# Altium PCB ECUEXT2_23.PcbDoc
Units mm, origin at the board's own origin, x right, y up, seen from the top; angles counter-clockwise.
Board outline 81.53 x 46.61 mm, 2 copper layers (Top Layer, Bottom Layer); 22 components, 27 nets, 140 pads, 5 vias.
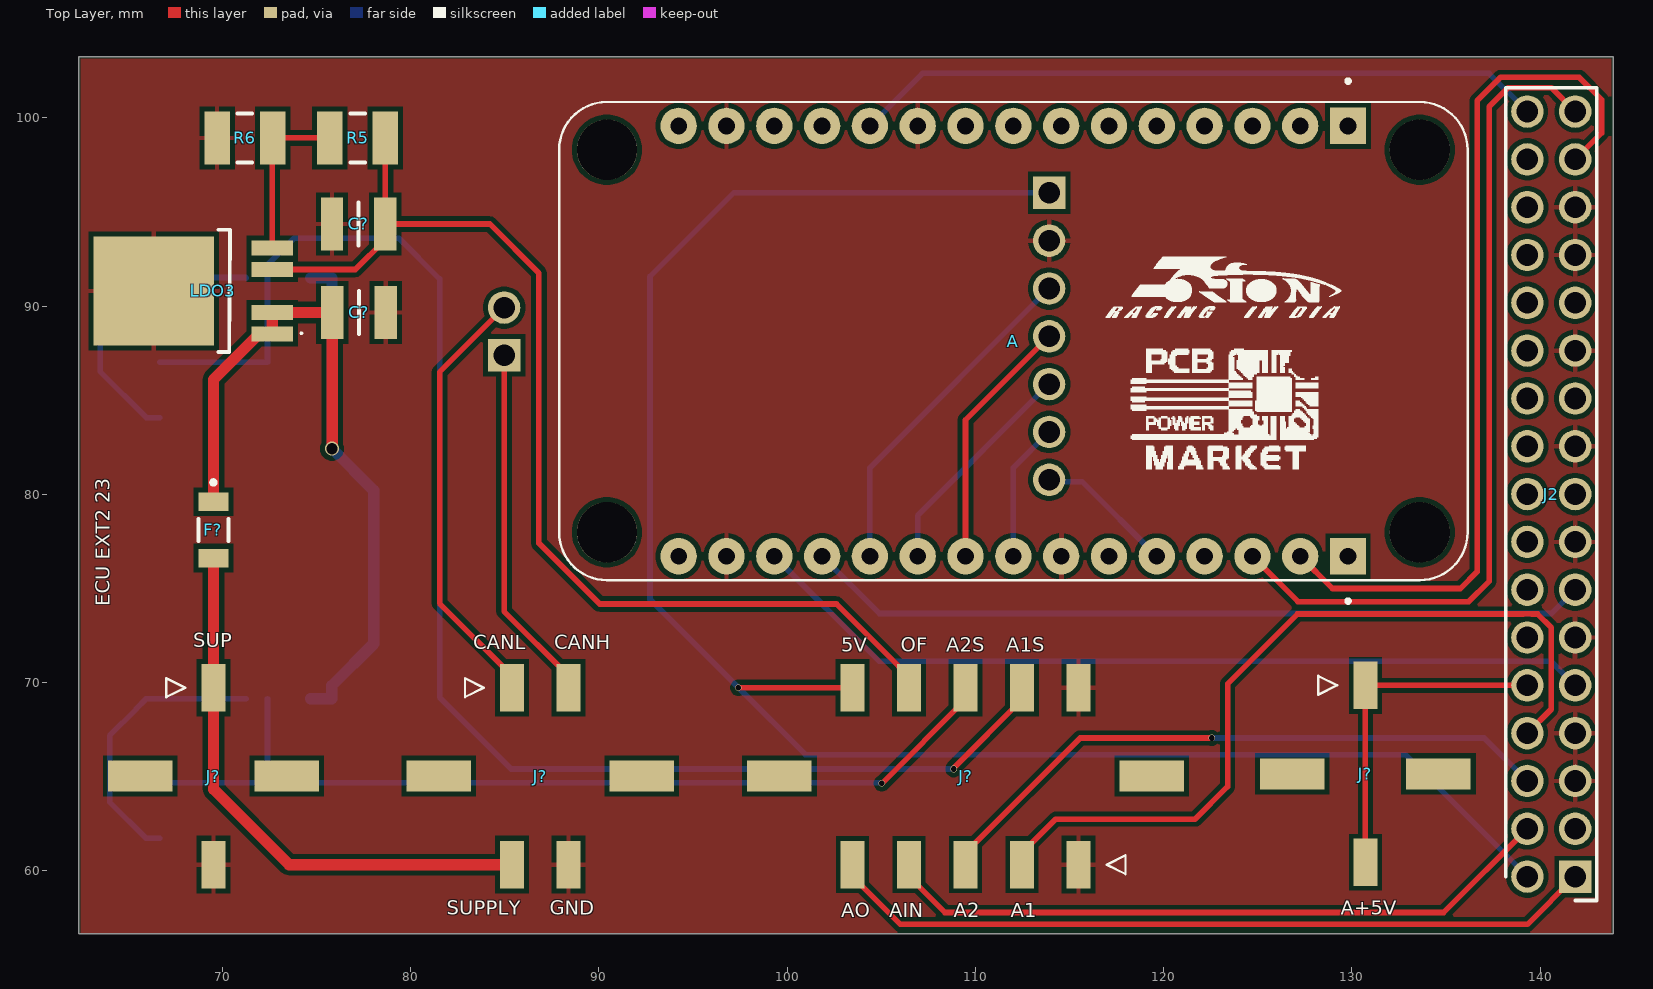
[diagram p0: Top Layer view]
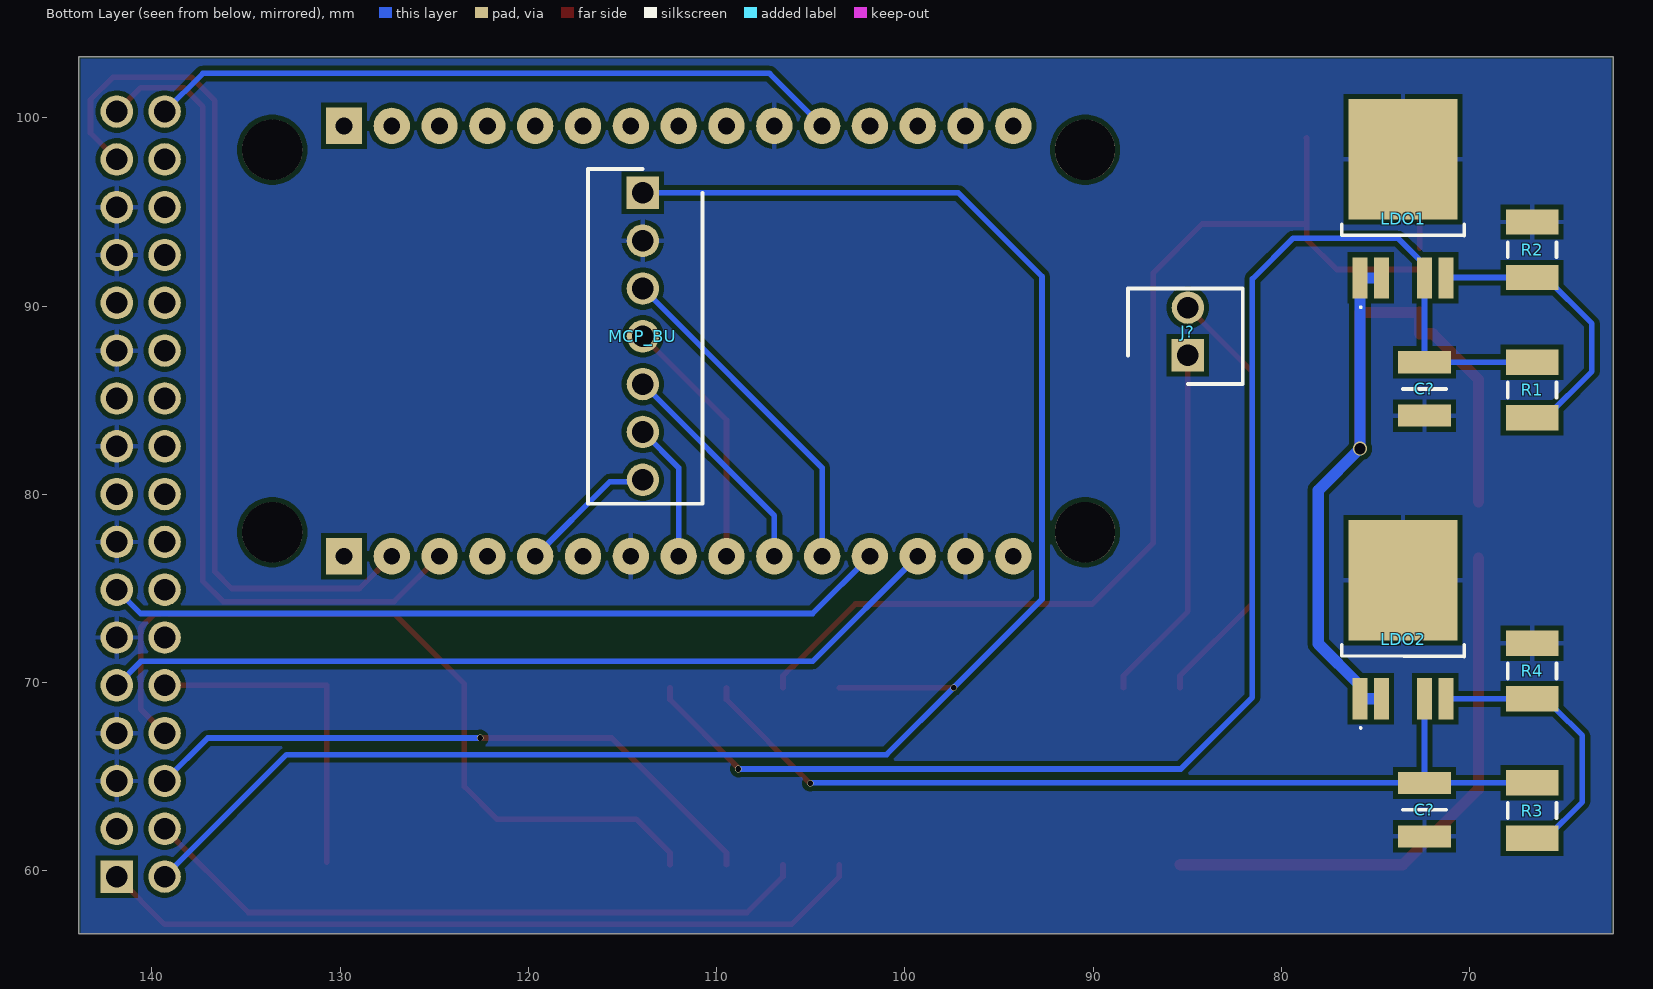
[diagram p1: Bottom Layer view, seen from below]
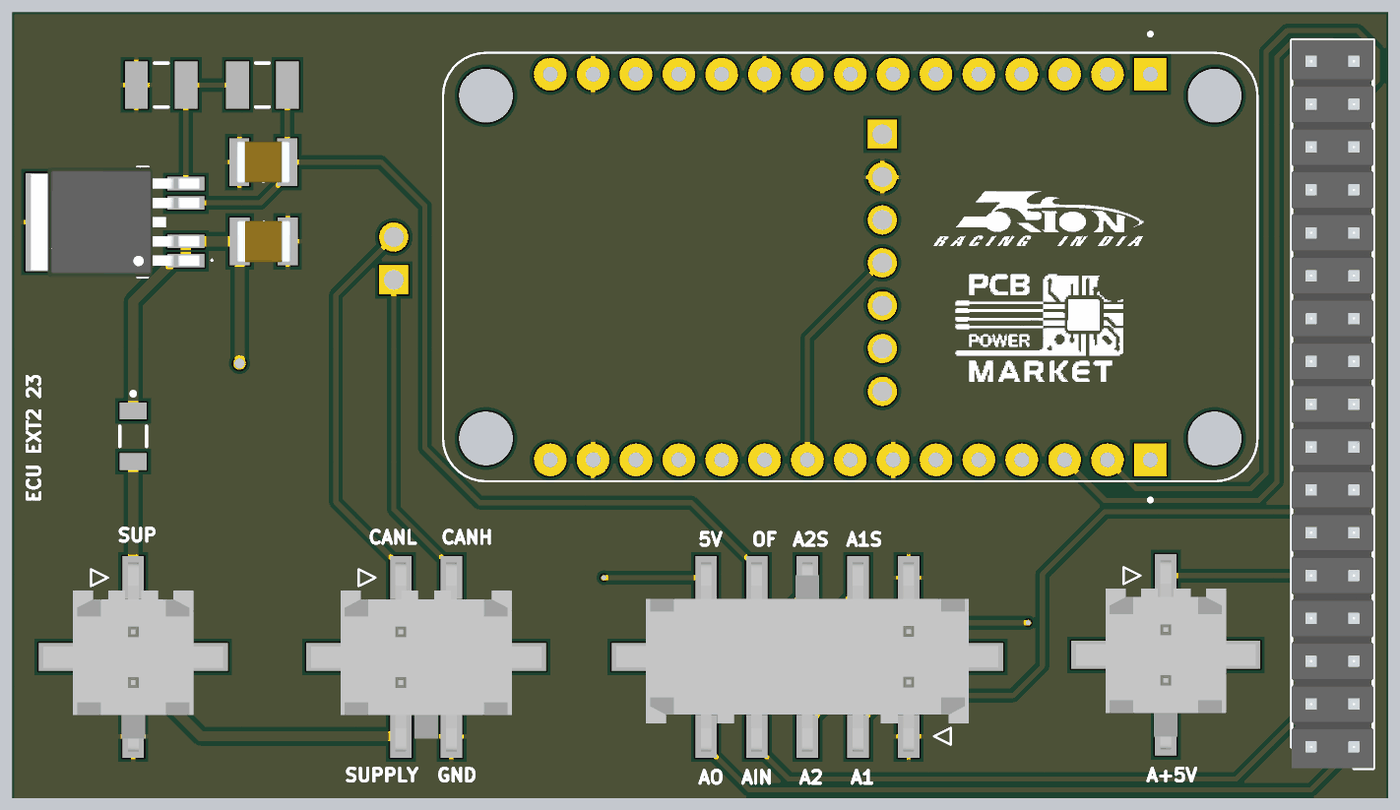
[diagram p2: 3D render of the assembled board from above, using the file's embedded part models]
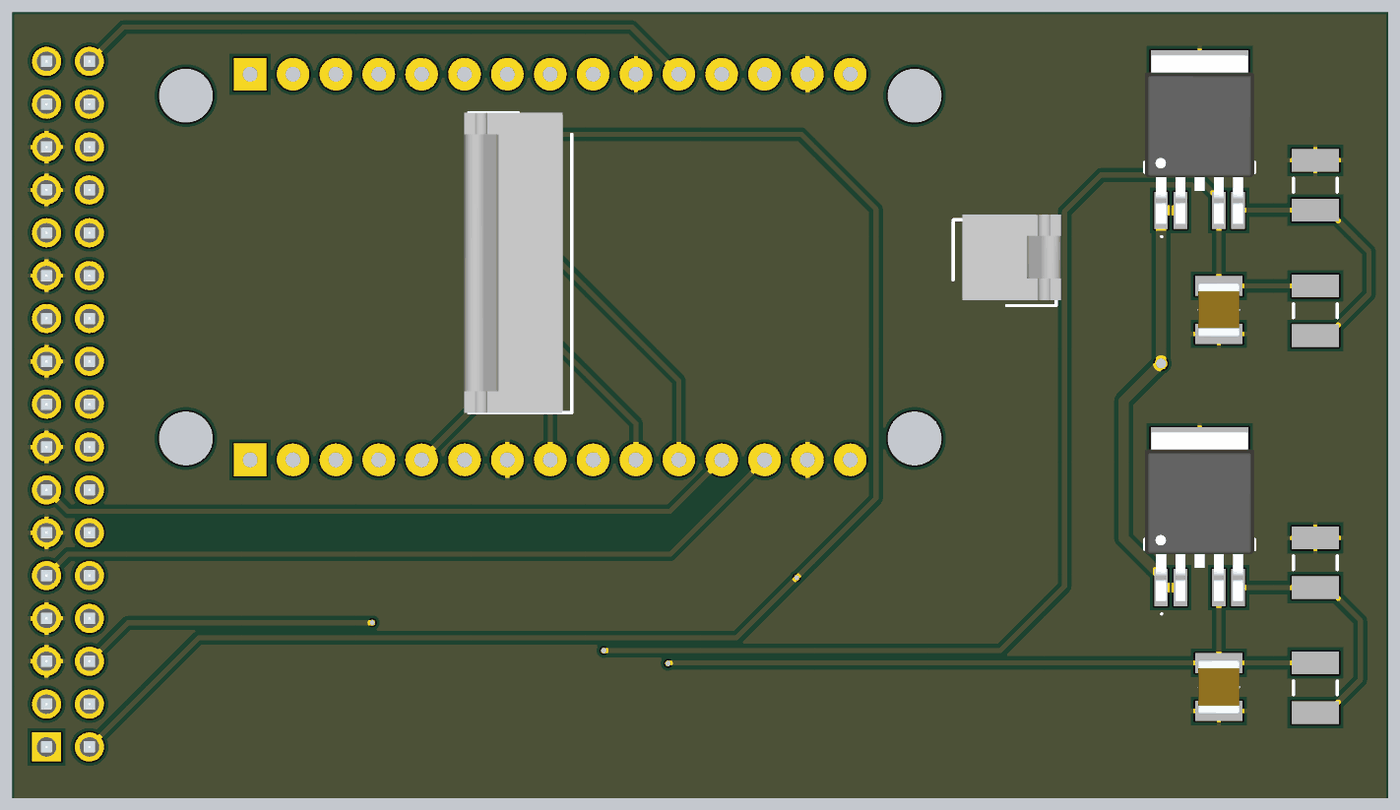
[diagram p3: 3D render of the assembled board from below, using the file's embedded part models]

## Layer stack, top to bottom
Top Solder: solder mask 0.0102, Solder Resist, Dk 3.5
Top Layer: signal copper 0.0356
Dielectric 1: dielectric 0.32, FR-4, Dk 4.8
Bottom Layer: signal copper 0.0356
Bottom Solder: solder mask 0.0102, Solder Resist, Dk 3.5

## Board outline
62.357,56.642 143.891,56.642 143.891,103.251 62.357,103.251

## Design rules (kind name [scope] priority, off if disabled: settings)
Clearance [All] p1: gap=0.254 ignorepadtopadclearanceinfootprint=FALSE except(0: Arc-Hole Track-Hole SMDPad-Hole THPad-Hole Via-Hole Fill-Hole Poly-Hole Region-Hole Text-Hole)
PolygonConnect [All] p1: connectstyle=Relief reliefconductorwidth=0.254 reliefentries=4 polygonreliefangle="90 Angle" airgapwidth=0.254
RoutingVias [All] p1: holewidth=0.3 width=0.35 viastyle="Through Hole" minholewidth=0.3 minwidth=0.35 maxholewidth=0.6 maxwidth=0.75
SolderMaskExpansion [All] p1: expansion=0.102 istentingtop=FALSE
Width [All] p1: maxlimit=0.6 minlimit=0.3 preferedwidth=0.3 minimp=50.000000 maximp=50.000000 favimp=50.000000
30 further rules are at their usual default settings.

## Classes and differential pairs
component class ECUEXT2_23: A C? F? J2 J? LDO1 LDO2 LDO3 MCP_BU R1 R2 R3 R4 R5 R6

## Components (designator, comment, footprint, x,y, rotation, side; value= is the part's Value field where it differs from the comment)
A "113990105" SEEED_113990105 112.014,88.138 r270 top
C? "CC1210KKX7R8BB105" CAPC3225X145N 72.39,63.246 r90 bottom
C? "CC1210KKX7R8BB105" CAPC3225X145N 77.233,94.358 r0 top
C? "CC1210KKX7R8BB105" CAPC3225X145N 72.39,85.598 r90 bottom
C? "CC1210KKX7R8BB105" CAPC3225X145N 77.256,89.659 r180 top
F? "NANOSMDC020F-2" TECO-NANOSMDC020F_V 69.521,78.105 r270 top
J2 "67997-234HLF" HDRV34W67P254_2X17_4318X483X858P 141.859,59.69 r90 top
J? "640456-2" SHDR2W66P0X254_1X2_508X572X1041P 84.963,87.376 r270 bottom
J? "43045-1018" 43045-10YY_181920 109.474,65.024 r0 top
J? "43045-0218" 43045-02YY_181920 69.521,65.024 r180 top
J? "43045-0218" 43045-02YY_181920 130.711,65.151 r180 top
J? "43045-0419" 43045-04YY_181920 86.882,65.024 r180 top
LDO1 "TLF1963TEATMA1" TLF1963TEATMA1 73.533,95.74 r180 bottom
LDO2 "TLF1963TEATMA1" TLF1963TEATMA1 73.533,73.388 r180 bottom
LDO3 "TLF1963TEATMA1" TLF1963TEATMA1 68.394,90.802 r90 top
MCP_BU "640456-7" 6404567 113.915,96.01 r90 bottom
R1 "RC1210JR-0710KL" RESC3126X60X50ML10T20 66.675,85.547 r90 bottom
R2 "RC1210JR-0710KL" RESC3126X60X50ML10T20 66.675,92.989 r270 bottom
R3 "RC1210JR-0710KL" RESC3126X60X50ML10T20 66.675,63.195 r90 bottom
R4 "RC1210JR-0710KL" RESC3126X60X50ML10T20 66.675,70.612 r270 bottom
R5 "RC1210JR-0710KL" RESC3126X60X50ML10T20 77.182,98.93 r0 top
R6 "RC1210JR-0710KL" RESC3126X60X50ML10T20 71.188,98.93 r0 top

## Footprints (in the part's own frame and the unit in brackets; to place one, negate y for a bottom-side part, rotate by r counter-clockwise, add the part's x,y. Pads: shape width x height; smd on the part's side, far side on the other; paste and mask are expansions set on the pad)
43045-02YY_181920 [mm]
  rect 1.27x2.54 smd: 1(0,-4.7) 2(0,4.7)
  rect 3.43x1.65 smd: 3(3.885,0) 4(-3.885,0)
  silkscreen extent 1.5,-5.2 2.5,-4.2, body extent -5.33,-5.6 5.33,5.6, height 9.96
43045-04YY_181920 [mm]
  rect 1.27x2.54 smd: 1(1.5,-4.7) 2(-1.5,-4.7) 3(1.5,4.7) 4(-1.5,4.7)
  rect 3.43x1.65 smd: 5(5.385,0) 6(-5.385,0)
  silkscreen extent 3,-5.2 4,-4.2, body extent -6.83,-5.6 6.83,5.6, height 9.96
43045-10YY_181920 [mm]
  rect 1.27x2.54 smd: 1(6,-4.7) 2(3,-4.7) 3(0,-4.7) 4(-3,-4.7) 5(-6,-4.7) 6(6,4.7) 7(3,4.7) 8(0,4.7) 9(-3,4.7) 10(-6,4.7)
  rect 3.43x1.65 smd: 11(9.885,0) 12(-9.885,0)
  silkscreen extent 7.5,-5.2 8.5,-4.2, body extent -11.32,-5.6 11.32,5.6, height 9.96
6404567 [mm]
  rect 1.725x1.725 hole 1.15: 1(0,0)
  round 1.725 hole 1.15: 2(-2.54,0) 3(-5.08,0) 4(-7.62,0) 5(-10.16,0) 6(-12.7,0) 7(-15.24,0)
  silkscreen extent -16.51,-3.17 1.27,2.92, body extent -16.51,-2.65 1.27,3.19, height 9.93
CAPC3225X145N [mm]
  rect 1.18x2.82 smd: 1(-1.42,0) 2(1.42,0)
  silkscreen extent 0,-1.15 0,1.15, body extent -1.6,-1.25 1.6,1.25, height 1.45
HDRV34W67P254_2X17_4318X483X858P [mm]
  rect 1.725x1.725 hole 1.15: 1(0,0)
  round 1.725 hole 1.15: 2(0,2.54) 3(2.54,0) 4(2.54,2.54) 5(5.08,0) 6(5.08,2.54) 7(7.62,0) 8(7.62,2.54) 9(10.16,0) 10(10.16,2.54) 11(12.7,0) 12(12.7,2.54) 13(15.24,0) 14(15.24,2.54) 15(17.78,0) 16(17.78,2.54) 17(20.32,0) 18(20.32,2.54) 19(22.86,0) 20(22.86,2.54) 21(25.4,0) 22(25.4,2.54) 23(27.94,0) 24(27.94,2.54) 25(30.48,0) 26(30.48,2.54) 27(33.02,0) 28(33.02,2.54) 29(35.56,0) 30(35.56,2.54) 31(38.1,0) 32(38.1,2.54) 33(40.64,0) 34(40.64,2.54)
  silkscreen extent -1.27,-1.14 41.91,3.68, body extent -1.27,-1.14 41.91,3.68, height 8.58
RESC3126X60X50ML10T20 [mm] "Chip Resistor, 2-Leads, Body 3.10x2.60mm, IPC Low Density"
  rect 1.35x2.8 smd: 1(-1.475,0) 2(1.475,0)
  silkscreen extent -0.4,-1.3 0.4,1.3, body extent -1.6,-1.35 1.6,1.35, height 0.6
SEEED_113990105 [mm]
  rect 1.93x1.93 hole 0.889: J1_1(-11.43,17.78) J2_1(11.43,17.78)
  round 1.93 hole 0.889: J1_2(-11.43,15.24) J1_3(-11.43,12.7) J1_4(-11.43,10.16) J1_5(-11.43,7.62) J1_6(-11.43,5.08) J1_7(-11.43,2.54) J1_8(-11.43,0) J1_9(-11.43,-2.54) J1_10(-11.43,-5.08) J1_11(-11.43,-7.62) J1_12(-11.43,-10.16) J1_13(-11.43,-12.7) J1_14(-11.43,-15.24) J1_15(-11.43,-17.78) J2_2(11.43,15.24) J2_3(11.43,12.7) J2_4(11.43,10.16) J2_5(11.43,7.62) J2_6(11.43,5.08) J2_7(11.43,2.54) J2_8(11.43,0) J2_9(11.43,-2.54) J2_10(11.43,-5.08) J2_11(11.43,-7.62) J2_12(11.43,-10.16) J2_13(11.43,-12.7) J2_14(11.43,-15.24) J2_15(11.43,-17.78)
  round 3.2 hole 3.2 unplated: ""(-10.16,21.59) ""(-10.16,-21.59) ""(10.16,21.59) ""(10.16,-21.59)
  silkscreen extent -13.91,-24.13 13.91,24.13
SHDR2W66P0X254_1X2_508X572X1041P [mm]
  rect 1.725x1.725 hole 1.15: 1(0,0)
  round 1.725 hole 1.15: 2(-2.54,0)
  silkscreen extent -3.56,-3.17 1.52,2.92, body extent -3.88,-2.62 1.2,3.22, height 9.88
TECO-NANOSMDC020F_V [mm] "SMD, 2-Leads, Body 3.2x1.585mm"
  rect 1x1.6 smd: 1(-1.5,0) 2(1.5,0)
  silkscreen extent -2.62,-0.79 0.6,0.79, body extent -1.6,-0.79 1.6,0.79, height 0.82
TLF1963TEATMA1 [mm]
  rect 0.8x2.2 smd: 1(-2.28,-4.25) 2(-1.14,-4.25) 4(1.14,-4.25) 5(2.28,-4.25)
  rect 5.8x6.4 smd: 3(0,2.05)
  silkscreen extent -3.25,-5.85 3.25,-1.4, body extent -3.25,-5.04 3.25,4.94, height 2.42

## Part data
A: "An open-source firmware and development kit that helps you to Prototype your IOT product within a few Lua script lines", Package=None, Availability=Unavailable, MF="Seeed Technology", MP="NodeMCU v2", Price=None, SnapEDA_Link=https://www.snapeda.com/parts/NodeMCU%20v2/Seeed%20Technology%20Co.%2C%20Ltd/view-part/378076/?ref=snap
C? C? C? C?: "Capacitor", Manufacturer_Name="YAGEO (PHYCOMP)", Mouser Part Number=603-CC121KKX7R8BB105, Arrow Part Number=CC1210KKX7R8BB105, Arrow Price/Stock=https://www.arrow.com/en/products/cc1210kkx7r8bb105/yageo?region=nac, Datasheet Link=https://datasheet.datasheetarchive.com/originals/distributors/Datasheets_SAMA/d9f127a4875522309d99aa7dec79633c.pdf, Height=1.45mm, Manufacturer_Part_Number=CC1210KKX7R8BB105, Mouser Price/Stock=https://www.mouser.com/Search/Refine.aspx?Keyword=603-CC121KKX7R8BB105
F?: library part CMP-2000-06804-1, "PolySwitch Resettable Device, 24 V, 100 A, -40 to 85 degC, 2-Pin SMD (1206), RoHS, Tape and Reel", Hold Current=0.2A, Manufacturer=TEConnectivity/CircuitProtection, Maximum Current Rating=100A, Maximum Initial Resistance=N/A, Maximum Post Trip Resistance=2.6Ohm, Maximum Voltage Rating=24VDC, Minimum Initial Resistance=0.65Ohm, Operating Temperature=85(Max)C, Package Description="2-Pin Surface Mount Device, Body 3.2 x 1.585 mm", Package Reference=1206, Trip Current=0.42A, Typical Power Dissipation=0.6(Max)W, Agency Approvals=CSA,UL,TUV, Applications=N/A, Datasheet URL=https://datasheet.ciiva.com/30470/0900766b812a99d0-30470053.pdf, Datasheet Version=02/2014, Dimension=3.4(Max)x1.8(Max)x0.82(Max)mm, Family=nanoSMD, Lead Diameter=N/R, Manufacturer URL=http://www.te.com/, Maximum Trip Time=0.1@8As, Mounting=SurfaceMount, Mounting Technology=SurfaceMount, Number of Terminals=2, Package/Case=1206, Packaging=TapeandReel, Part No=NANOSMDC020F-2, RoHS=Yes, Seated Plane Height=N/R, Terminal Pitch=N/A, Wire Form=N/R
J2: "Connector", Manufacturer_Name=Amphenol, Mouser Part Number=649-67997-234HLF, Arrow Part Number=67997-234HLF, Arrow Price/Stock=https://www.arrow.com/en/products/67997-234hlf/amphenol-fci?region=nac, Datasheet Link=https://cdn.amphenol-icc.com/media/wysiwyg/files/drawing/67996.pdf, Height=8.58mm, Manufacturer_Part_Number=67997-234HLF, Mouser Price/Stock=https://www.mouser.co.uk/ProductDetail/Amphenol-FCI/67997-234HLF?qs=zh4O8xspOuxBU73L6U2QCQ%3D%3D
J?: "Connector", Manufacturer_Name="TE Connectivity", Mouser Part Number=571-6404562, Arrow Part Number=640456-2, Arrow Price/Stock=https://www.arrow.com/en/products/640456-2/te-connectivity?region=europe, Datasheet Link=http://www.te.com/commerce/DocumentDelivery/DDEController?Action=showdoc&DocId=Customer+Drawing%7F640456%7FW3%7Fpdf%7FEnglish%7FENG_CD_640456_W3.pdf%7F640456-2, Height=10.414mm, Manufacturer_Part_Number=640456-2, Mouser Price/Stock=https://www.mouser.co.uk/ProductDetail/TE-Connectivity-AMP/640456-2?qs=%2F35zJ5USjomRu3EJQJgZCQ%3D%3D
J?: "Connector", Manufacturer_Name=Molex, Mouser Part Number=538-43045-1018, Datasheet Link=https://www.molex.com/pdm_docs/sd/430450218_sd.pdf, Height=9.91mm, Manufacturer_Part_Number=43045-1018, Mouser Price/Stock=https://www.mouser.co.uk/ProductDetail/Molex/43045-1018?qs=KC2ywxza1kp09G%252BeESkbdg%3D%3D
J? J?: "Connector", Manufacturer_Name=Molex, Mouser Part Number=538-43045-0218, Arrow Part Number=43045-0218, Arrow Price/Stock=https://www.arrow.com/en/products/43045-0218/molex, Datasheet Link=https://www.molex.com/pdm_docs/sd/430450218_sd.pdf, Height=9.91mm, Manufacturer_Part_Number=43045-0218, Mouser Price/Stock=https://www.mouser.co.uk/ProductDetail/Molex/43045-0218?qs=4XSMV6Twtb2qUKINalLbdA%3D%3D
J?: "Connector", Manufacturer_Name=Molex, Mouser Part Number=538-43045-0419, Datasheet Link=https://www.molex.com/pdm_docs/sd/430450218_sd.pdf, Height=9.91mm, Manufacturer_Part_Number=43045-0419, Mouser Price/Stock=https://www.mouser.co.uk/ProductDetail/Molex/43045-0419?qs=UeCeOHRHQebVNIQyI9VWWg%3D%3D
LDO1 LDO2 LDO3: "Integrated Circuit", Manufacturer_Name=Infineon, Mouser Part Number=726-TLF1963TEATMA1, Arrow Part Number=TLF1963TEATMA1, Arrow Price/Stock=https://www.arrow.com/en/products/tlf1963teatma1/infineon-technologies-ag?region=nac, Datasheet Link=https://www.infineon.com/dgdl/Infineon-TLF1963-DS-v01_00-EN.pdf?fileId=5546d46258fc0bc1015969d2981941e0, Height=2.35mm, Manufacturer_Part_Number=TLF1963TEATMA1, Mouser Price/Stock=https://www.mouser.co.uk/ProductDetail/Infineon-Technologies/TLF1963TEATMA1?qs=SiyfpgnvCZluIGE%2FbZiglw%3D%3D
MCP_BU: "Connector", Manufacturer_Name="TE Connectivity", Mouser Part Number=571-6404567, Arrow Part Number=640456-7, Arrow Price/Stock=https://www.arrow.com/en/products/640456-7/te-connectivity?region=europe, Datasheet Link=https://www.te.com/commerce/DocumentDelivery/DDEController?Action=srchrtrv&DocNm=640456&DocType=Customer+Drawing&DocLang=English&DocFormat=pdf&PartCntxt=640456-7, Height=10.414mm, Manufacturer_Part_Number=640456-7, Mouser Price/Stock=https://www.mouser.co.uk/ProductDetail/TE-Connectivity-AMP/640456-7?qs=%2F35zJ5USjol1zdA9I4S5nQ%3D%3D
R1 R2 R3 R4 R5 R6: library part CMP-2005-01721-1, Manufacturer=Yageo, Part Number=RC1210JR-0710KL

## Via types
v1: diameter 0.35, hole 0.3, Top Layer to Bottom Layer, 4 vias
v2: diameter 0.75, hole 0.6, Top Layer to Bottom Layer, 1 vias

## Nets (pads, with @x,y where several pads share a name; then routed paths per layer and width w, separated by ;. In a path a pad name is that pad's centre, name@x,y a point inside that pad or via, vN(x,y) a via of type N, cw(c..) or ccw(c..) an arc to the next point about the centre after c; other vN are vias at no path point)
+3.3: A.J1_11 J2.34 | length 36.9
  Bottom Layer w0.3: A.J1_11 107.188,102.362 137.287,102.362 J2.34
+5: J2.2 J?.10 MCP_BU.1 | length 99
  Top Layer w0.3: v1(97.409,69.723) v1(97.409,69.723) J?.10
  Bottom Layer w0.3: MCP_BU.1 97.153,96.01 92.71,91.567 92.71,74.422 v1(97.409,69.723) 100.965,66.167 132.842,66.167 J2.2
+12: C?.2@75.836,89.659 F?.1 LDO1.1 LDO1.2 LDO2.1 LDO2.2 LDO3.1 LDO3.2 | length 48.7
  Top Layer w0.6: F?.1 69.521,86.099 71.944,88.522 LDO3.1 LDO3.2 ; LDO3.2@72.647,89.659 75.836,89.659 75.836,82.44 v2(75.819,82.423)
  Bottom Layer w0.6: LDO2.2 LDO2.1 75.813,69.838 78.036,72.061 78.036,80.206 75.816,82.426 75.816,91.487 LDO1.1 LDO1.2
"AIR+ 5V": J2.10 J?.1@130.711,69.851 J?.2@130.711,60.451 | length 18
  Top Layer w0.3: J?.2@130.711,60.451 130.711,69.851 130.712,69.85 J2.10
AMSIN: J2.4 J?.4@106.474,60.324 | length 36.1
  Top Layer w0.3: J?.4@106.474,60.324 106.474,59.689 108.378,57.785 134.874,57.785 J2.4
AMSOUT: J2.1 J?.5@103.474,60.324 | length 41.1
  Top Layer w0.3: J?.5@103.474,60.324 103.474,59.689 106.013,57.15 139.319,57.15 J2.1
APPS1: J2.8 J?.2@112.474,60.324 | length 43.6
  Top Layer w0.3: J?.2@112.474,60.324 112.474,60.959 114.253,62.738 121.666,62.738 123.398,64.47 123.398,69.931 127.104,73.637 139.098,73.637 cw(c139.319,72.39) 139.54,73.637 139.863,73.637 140.585,72.915 140.585,68.576 J2.8
APPS1_SUPPLY: C?.2@72.39,87.018 J?.7 LDO1.4 R1.2 | length 78.4
  Top Layer w0.3: v1(108.839,65.405) 108.849,65.415 108.849,65.464 112.474,69.089 J?.7
  Bottom Layer w0.3: R1.2 72.386,87.022 72.39,87.018 72.393,87.021 LDO1.4 72.393,92.19 73.802,93.599 79.375,93.599 81.534,91.44 81.534,69.215 85.344,65.405 v1(108.839,65.405)
APPS2: J2.6 J?.3@109.474,60.324 | length 34
  Top Layer w0.3: J?.3@109.474,60.324 109.474,60.959 115.571,67.056 v1(122.555,67.056)
  Bottom Layer w0.3: v1(122.555,67.056) 137.033,67.056 J2.6
APPS2_SUPPLY: C?.2@72.39,64.666 J?.8 LDO2.4 R3.2 | length 49.8
  Top Layer w0.3: v1(105.029,64.643) 109.474,69.089 J?.8
  Bottom Layer w0.3: R3.2 72.386,64.67 C?.2@72.39,64.666 ; LDO2.4 72.393,64.669 C?.2@72.39,64.666 ; v1(105.029,64.643) 105.015,64.643 104.992,64.666 C?.2@72.39,64.666
CANH: J?.1@84.963,87.376 J?.2@88.382,69.724 | length 19.1
  Top Layer w0.3: J?.1@84.963,87.376 84.963,73.778 88.382,70.359 J?.2@88.382,69.724
CANL: J?.1@85.382,69.724 J?.2@84.963,89.916 | length 23.2
  Top Layer w0.3: J?.2@84.963,89.916 81.534,86.487 81.534,74.207 85.382,70.359 J?.1@85.382,69.724
CS: A.J2_11 MCP_BU.3 | length 18.2
  Bottom Layer w0.3: A.J2_11 104.394,81.409 MCP_BU.3
GND: A.J1_10 A.J1_14 A.J2_7 A.J2_14 C?.1 J2.5 J2.7 J2.11 J2.15 J2.19 J2.23 J2.27 J2.29 J?.1@115.474,60.324 J?.2@69.521,60.324 J?.4@88.382,60.324 J?.6@115.474,69.724 LDO1.3 LDO2.3 LDO3.3 MCP_BU.2 R2.1 R4.1 R6.1
INT: A.J2_5 MCP_BU.7 | length 7.4
  Bottom Layer w0.3: MCP_BU.7 114.012,80.673 115.669,80.673 A.J2_5
NetLDO1_5: LDO1.5 R1.1 R2.2 | length 15.5
  Bottom Layer w0.3: R1.1 65.95,84.072 63.5,86.522 63.5,89.064 65.95,91.514 R2.2 71.229,91.514 LDO1.5
NetLDO2_5: LDO2.5 R3.1 R4.2 | length 15.1
  Bottom Layer w0.3: R3.1 65.95,61.72 64.008,63.662 64.008,67.183 65.425,68.6 65.425,68.612 65.95,69.137 R4.2 71.252,69.137 LDO2.5
NetLDO3_5: LDO3.5 R5.1 R6.2 | length 8.9
  Top Layer w0.3: LDO3.5 72.644,98.911 R6.2 R5.1
OFFSET: C?.2@78.653,94.358 J?.9 LDO3.4 R5.2 | length 58.9
  Top Layer w0.3: LDO3.4 77.057,91.942 78.653,93.538 C?.2@78.653,94.358 ; R5.2 78.653,98.926 C?.2@78.653,94.358 ; J?.9 106.474,70.359 105.989,70.844 105.94,70.844 102.616,74.168 90.043,74.168 86.804,77.406 86.804,91.757 84.204,94.358 C?.2@78.653,94.358
RX: A.J2_12 J2.13 | length 41.8
  Bottom Layer w0.3: A.J2_12 104.898,73.664 140.593,73.664 J2.13
SCK: A.J2_8 MCP_BU.6 | length 7.4
  Bottom Layer w0.3: A.J2_8 112.014,81.409 MCP_BU.6
SCL: A.J2_2 J2.31 | length 46.9
  Top Layer w0.3: A.J2_2 128.969,74.993 135.763,74.993 136.652,75.882 136.652,100.901 137.901,102.151 142.07,102.151 143.256,100.965 143.256,99.187 J2.31
SDA: A.J2_3 J2.33 | length 44.7
  Top Layer w0.3: A.J2_3 127.127,74.295 136.207,74.295 137.287,75.374 137.287,100.584 138.299,101.596 140.593,101.596 J2.33
SI: A.J2_10 MCP_BU.5 | length 12
  Bottom Layer w0.3: A.J2_10 106.934,78.869 MCP_BU.5
SO: A.J2_9 MCP_BU.4 | length 13.5
  Top Layer w0.3: A.J2_9 109.474,83.949 MCP_BU.4
SUPPLY: F?.2 J?.1@69.521,69.724 J?.3@85.382,60.324 | length 29.8
  Top Layer w0.6: F?.2 69.521,69.851 69.521,64.337 73.533,60.325 85.381,60.325 J?.3@85.382,60.324
TX: A.J2_13 J2.9 | length 45.4
  Bottom Layer w0.3: A.J2_13 104.898,71.124 140.585,71.124 J2.9
pads on no net: A. A.J1_1 A.J1_2 A.J1_3 A.J1_4 A.J1_5 A.J1_6 A.J1_7 A.J1_8 A.J1_9 A.J1_12 A.J1_13 A.J1_15 A.J2_1 A.J2_4 A.J2_6 A.J2_15 J2.3 J2.12 J2.14 J2.16 J2.17 J2.18 J2.20 J2.21 J2.22 J2.24 J2.25 J2.26 J2.28 J2.30 J2.32 J?.3@65.636,65.024 J?.3@126.826,65.151 J?.4@73.406,65.024 J?.4@134.596,65.151 J?.5@81.497,65.024 J?.6@92.267,65.024 J?.11 J?.12

## Polygon pours and split planes (outlines as drawn)
GND on Top Layer "GND_L01_P000" (solid, remove dead copper, pour order 0): 62.484,103.124 143.764,103.124 143.764,56.642 62.484,56.642
GND on Bottom Layer "GND_L02_P001" (solid, remove dead copper, pour order 1): 62.484,56.642 143.764,56.642 143.764,103.124 62.484,103.124

## Silkscreen, mask and mechanical layers (free items; w line width, h text height)
Top Overlay:
  drawing of 48 lines, arcs and shapes, not listed
  text "ECU EXT2 23" at 64.008,74.041 h0.76 r90
  text "SUP" at 68.453,71.882 h0.76
  text "CANL" at 83.312,71.755 h0.76
  text "CANH" at 87.63,71.755 h0.76
  text "5V" at 102.87,71.628 h0.76
  text "OF" at 106.045,71.628 h0.76
  text "A2S" at 108.458,71.628 h0.76
  text "A1S" at 111.633,71.628 h0.76
  text "SUPPLY" at 81.915,57.658 h0.76
  text "GND" at 87.376,57.658 h0.76
  text "A+5V" at 129.413,57.658 h0.76
  text "AO" at 102.87,57.531 h0.76
  text "AIN" at 105.41,57.531 h0.76
  text "A2" at 108.839,57.531 h0.76
  text "A1" at 111.887,57.531 h0.76